# Altium PCB HLW8012-Demo_0815.PcbDoc
Units mm, origin at the board's own origin, x right, y up, seen from the top; angles counter-clockwise.
Board outline 64.25 x 81.25 mm, 2 copper layers (Top Layer, Bottom Layer); 76 components, 58 nets, 236 pads, 50 vias.
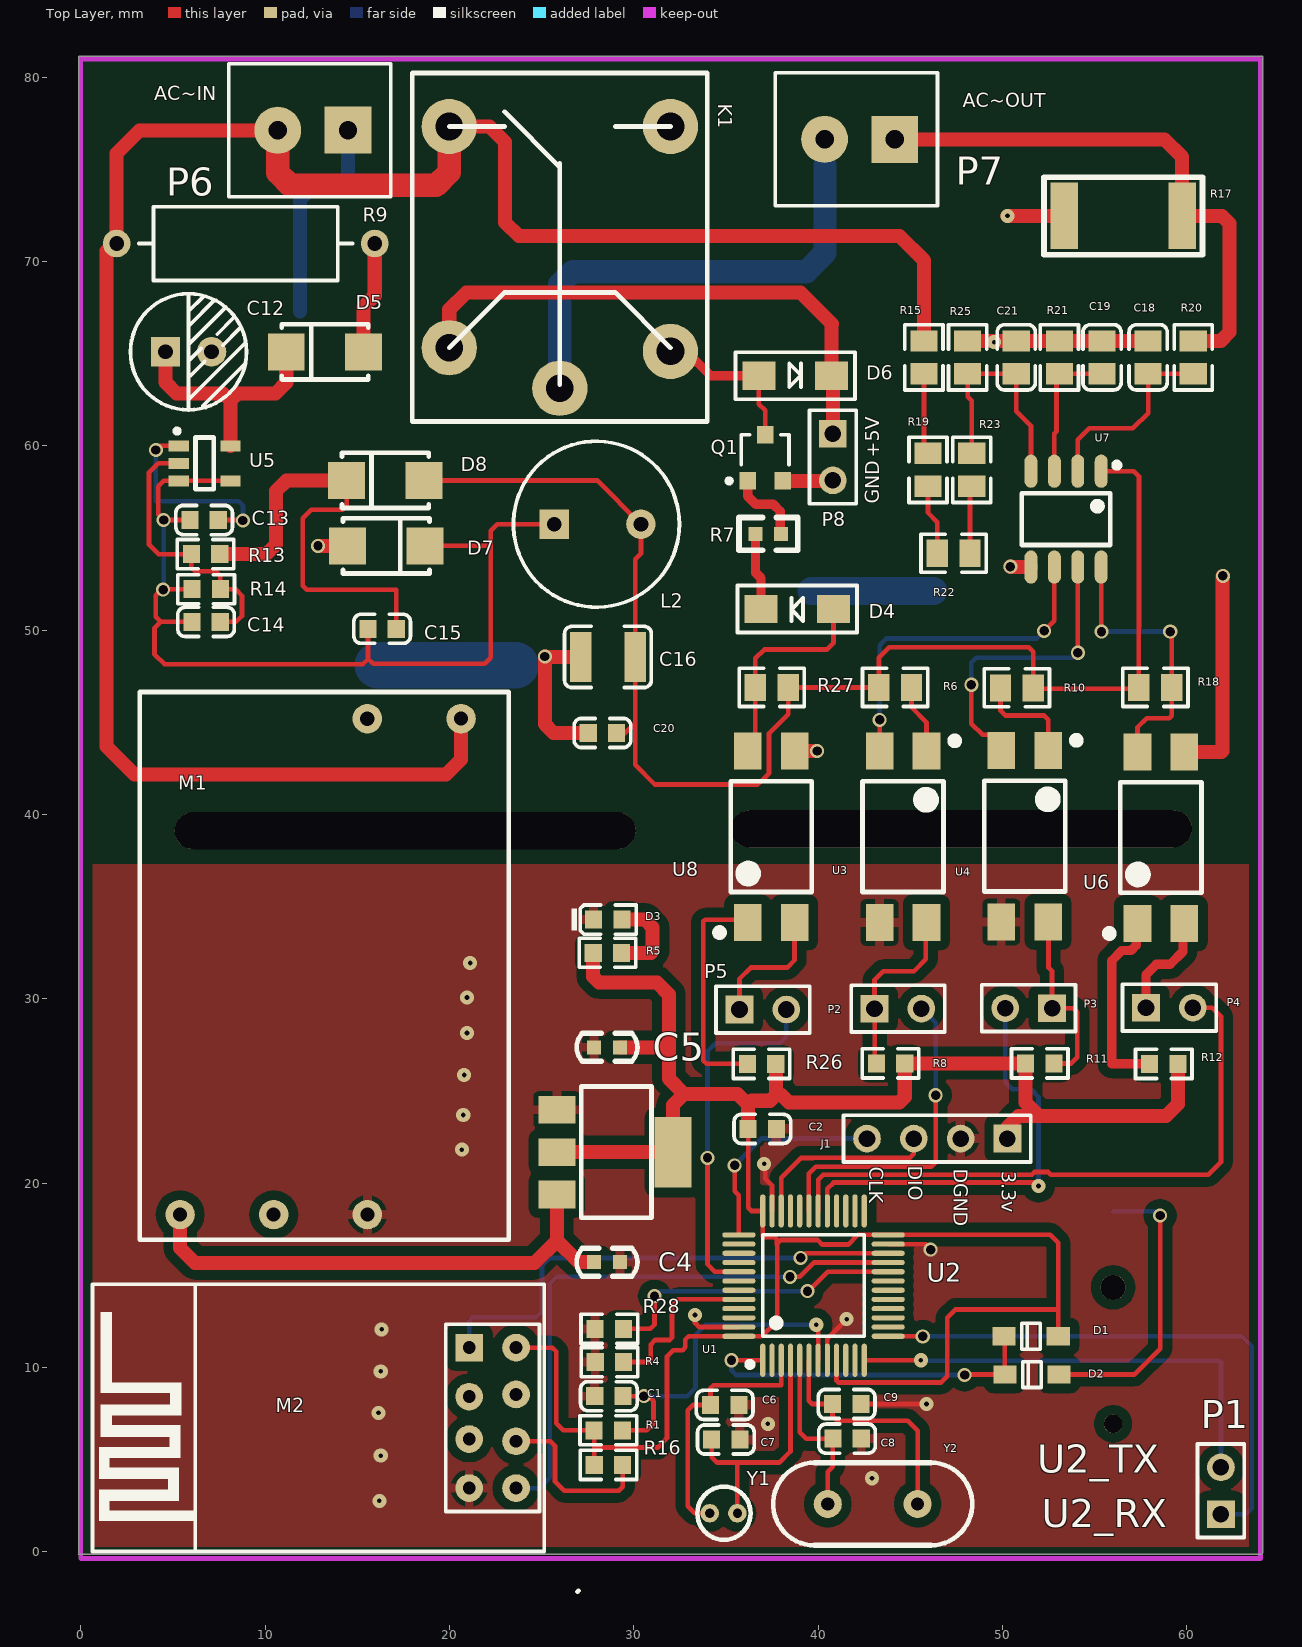
[diagram p0: Top Layer view]
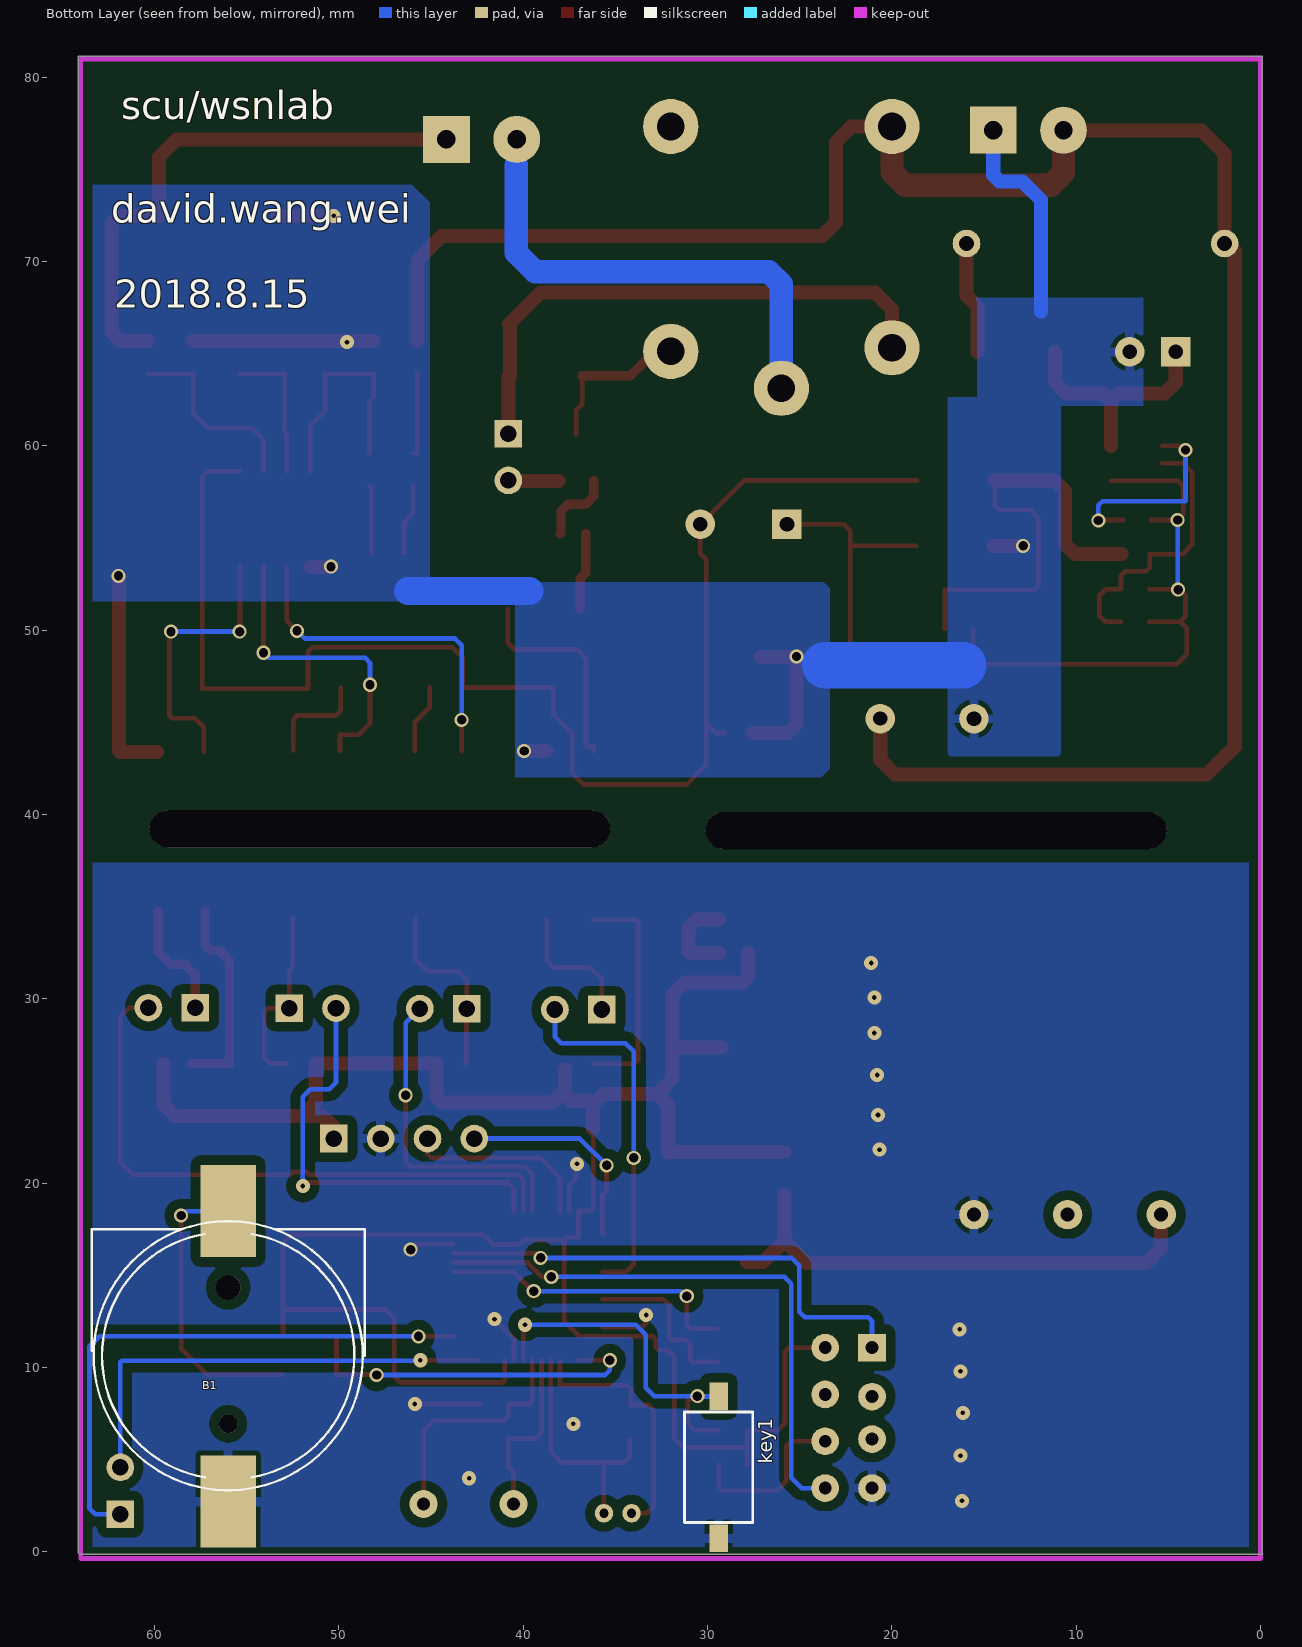
[diagram p1: Bottom Layer view, seen from below]
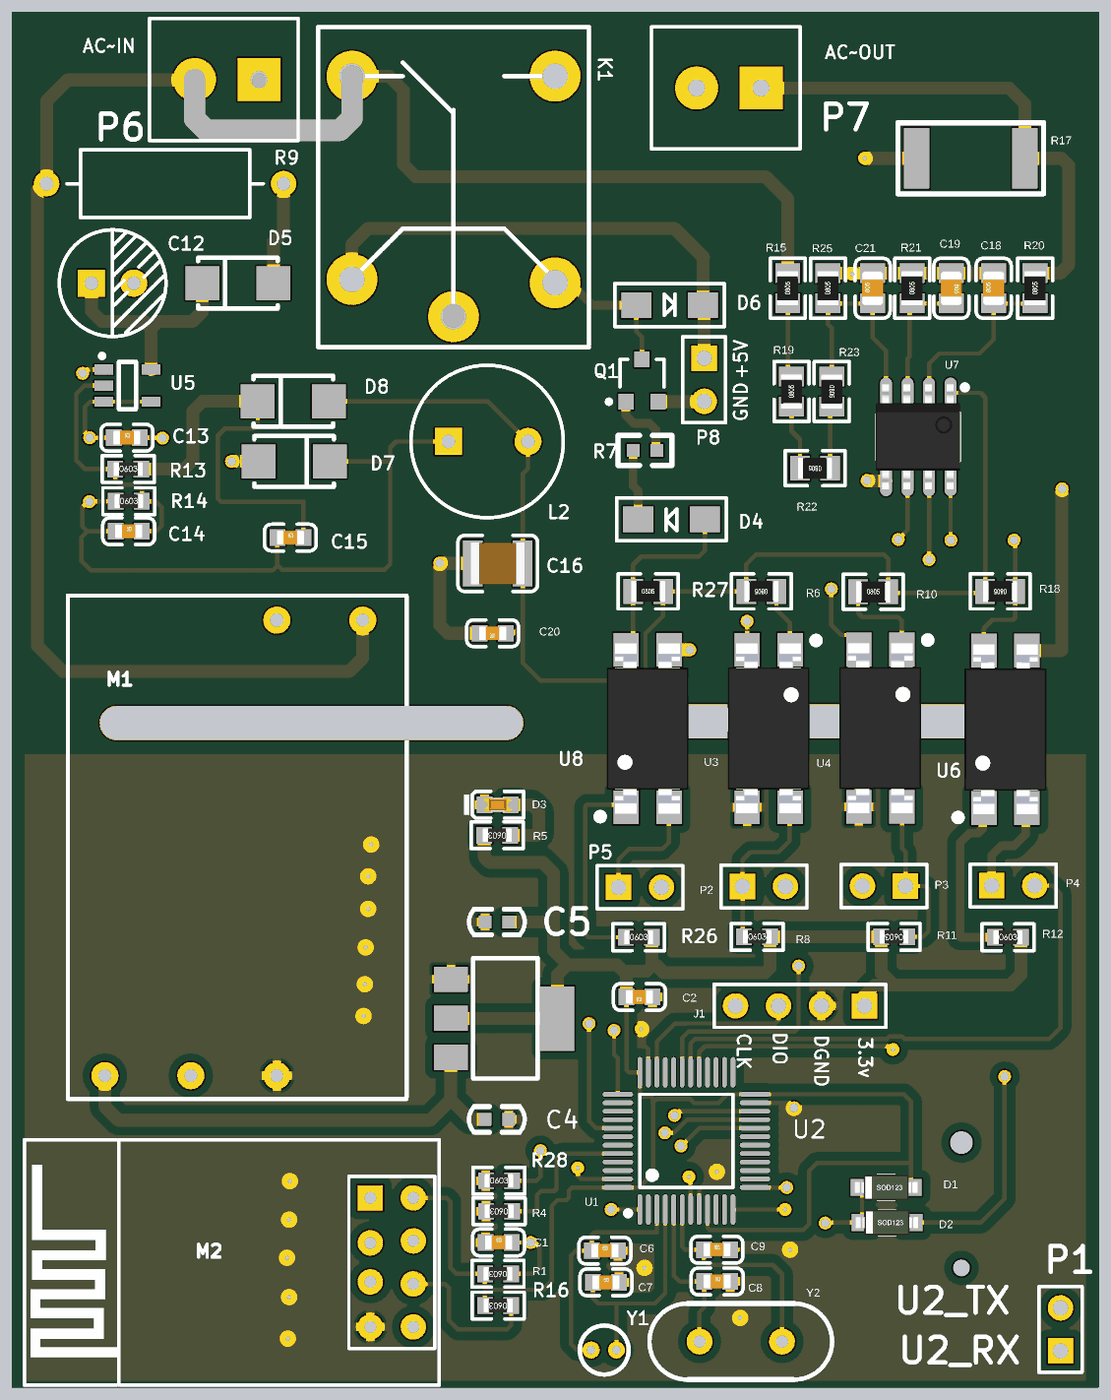
[diagram p2: 3D render of the assembled board from above, using the file's embedded part models]

## Layer stack, top to bottom
Top Solder: solder mask 0.0102, Solder Resist, Dk 3.5
Top Layer: signal copper 0.0356
Dielectric 1: dielectric 0.32, FR-4, Dk 4.8
Bottom Layer: signal copper 0.0356
Bottom Solder: solder mask 0.0102, Solder Resist, Dk 3.5

## Board outline
64.125,81.125 64.125,-0.05 64.05,-0.125 -0.125,-0.125 -0.1,-0.1 -0.1,81.125

## Design rules (kind name [scope] priority, off if disabled: settings)
Clearance Clearance_1 [InPolygon] p1: gap=0.508 ignorepadtopadclearanceinfootprint=FALSE except(0: Arc-Hole Track-Hole SMDPad-Hole THPad-Hole Via-Hole Fill-Hole Poly-Hole Region-Hole Text-Hole)
Clearance [All] p2: gap=0.178 ignorepadtopadclearanceinfootprint=FALSE except(0: Arc-Hole Track-Hole SMDPad-Hole THPad-Hole Via-Hole Fill-Hole Poly-Hole Region-Hole Text-Hole)
ComponentClearance [All] p1: gap=0.102 collisioncheckmode=3 verticalgap=0.102 showdistances=FALSE
DiffPairsRouting [All] p1: maxlimit=0.254 minlimit=0.254 mostfreqgap=0.254 toplayer_minwidth=0.254 toplayer_maxwidth=0.381 toplayer_prefwidth=0.381 bottomlayer_minwidth=0.254 bottomlayer_maxwidth=0.381 bottomlayer_prefwidth=0.381 maxuncoupledlength=12.7
HoleSize [All] p1: absolutevalues=TRUE maxlimit=12.7 minlimit=0.025 maxpercent=80.000 minpercent=20.000
HoleToHoleClearance [All] p1: gap=0.102 allowstackedmicrovias=TRUE
MinimumSolderMaskSliver [All] p1: minsoldermaskwidth=0.102
PolygonConnect PolygonConnect_1 [Isvia] p1: connectstyle=Direct reliefconductorwidth=0.254 reliefentries=4 polygonreliefangle="90 Angle" airgapwidth=0.254
PolygonConnect [All] p2: connectstyle=Relief reliefconductorwidth=0.508 reliefentries=4 polygonreliefangle="90 Angle" airgapwidth=0.254
RoutingVias [All] p1: holewidth=0.508 width=0.762 viastyle="Through Hole" minholewidth=0.254 minwidth=0.254 maxholewidth=0.711 maxwidth=1.27
SilkToSilkClearance [All] p1: silktosilkclearance=0.102
SilkToSolderMaskClearance [IsPad] p1: minsilkscreentomaskgap=0 clearancetoexposedcopper=TRUE
SolderMaskExpansion [All] p1: expansion=0.102
Width [All] p1: maxlimit=12.7 minlimit=0.254 preferedwidth=0.254 minimp=50.000000 maximp=50.000000 favimp=50.000000
23 further rules are at their usual default settings.

## Components (designator, comment, footprint, x,y, rotation, side; value= is the part's Value field where it differs from the comment)
B1 "BAT" "BATTERY SOCKET" 56,10.614 r270 bottom value=红色
C1 "0.1μF" LC-0603_C 28.65,8.45 r0 top
C2 "0.1μF" LC-0603_C 36.975,22.95 r180 top
C4 "104" 0603C 28.4,15.75 r180 top
C5 "104" 0603C 28.701,27.343 r0 top
C6 "6pF" LC-0603_C 34.93,7.975 r0 top
C7 "6pF" LC-0603_C 34.995,6.1 r0 top
C8 "20pF" LC-0603_C 41.57,6.15 r0 top
C9 "20pF" LC-0603_C 41.55,8.025 r0 top
C12 "3.3μF/400V" CAP-ELECT-TH-6.3X7 5.85,65.1 r0 top value=2.2μF/400V
C13 "2.2μF/10V" LC-0603_C 6.695,55.975 r0 top value="100nF (104) ±10% 50V"
C14 "470pF" LC-0603_C 6.8,50.45 r0 top value="100nF (104) ±10% 50V"
C15 "220nF" LC-0603_C 16.35,50.075 r0 top value="100nF (104) ±10% 50V"
C16 "100μF" LC-1210_C 28.6,48.55 r0 top value="100nF (104) ±10% 50V"
C18 "33nF" LC-0805_C 57.9,64.8 r90 top value="100nF (104) ±10% 50V"
C19 "33nF" LC-0805_C 55.4,64.8 r270 top value="100nF (104) ±10% 50V"
C20 "0.1μF" LC-0603_C 28.3,44.425 r180 top value="100nF (104) ±10% 50V"
C21 "33nF" LC-0805_C 50.75,64.8 r90 top value="100nF (104) ±10% 50V"
D1 "MBR0520L" LC-SOD-123 51.55,11.7 r0 top
D2 "MBR0520L" LC-SOD-123 51.6,9.625 r0 top
D3 "POWER" LC-0603_LED_S1 28.595,34.3 r0 top value=红色
D4 "IN4148" 1206D 42.107,51.912 r270 top
D5 "1N4007" LC-SMA(DO-214AC)_S1 13.25,65.1 r0 top
D6 "" 1206D 35.518,63.038 r90 top
D7 "US1J(600V 1A)" LC-SMA(DO-214AC)_S1 16.575,54.575 r180 top
D8 "1N4007" LC-SMA(DO-214AC)_S1 16.525,58.125 r0 top
J1 "4P/NC" HDR1X4 50.27,22.425 r180 top
K1 "Relay-5V" RLAYSPDT 24.975,71.25 r90 top
key1 "SW" KEY-2 29.4,0.75 r90 bottom
L2 "1mH" L-10X14 27.975,55.75 r0 top
M1 "ACDC_THX208based" ACDC_THX208 23.15,46.65 r270 top
M2 "ESP-01&01S Module" "ESP-01&01S Module" 22.345,7.275 r90 top
P1 "Header" HDR1X2 61.85,2.05 r90 top
P2 "Header" HDR1X2 43.06,29.475 r0 top
P3 "Header" HDR1X2 52.69,29.5 r180 top
P4 "Header" HDR1X2 57.785,29.525 r0 top
P5 "Header" HDR1X2 35.735,29.425 r0 top
P6 "Header" 3.81-2P 14.5,77.15 r180 top
P7 "Header" 3.81-2P 44.16,76.65 r180 top
P8 "Header" HDR1X2 40.8,60.665 r270 top
Q1 "S8050" SOT-23 37.125,59.35 r0 top
R1 "10KΩ" LC-0603_R 28.62,6.6 r180 top
R4 "10KΩ" LC-0603_R 28.68,10.3 r180 top
R5 "1.5KΩ" LC-0603_R 28.57,32.5 r180 top
R6 "1KΩ,1%" LC-0805_R 44.175,46.9 r180 top
R7 "Res2" 0603 37.997,55.225 r180 top value=4.7K
R8 "2.2KΩ" LC-0603_R 43.93,26.5 r0 top
R9 "39Ω/1W" R-1W-THT 8.95,70.975 r0 top
R10 "1KΩ,1%" LC-0805_R 50.785,46.875 r0 top
R11 "2.2KΩ" LC-0603_R 52.02,26.5 r180 top
R12 "2.2KΩ" LC-0603_R 58.75,26.475 r0 top
R13 "5.49KΩ" LC-0603_R 6.775,54.125 r0 top
R14 "4.99KΩ" LC-0603_R 6.805,52.225 r0 top
R15 "470KΩ,1%" LC-0805_R 45.735,64.8 r90 top
R16 "4.7KΩ" LC-0603_R 28.625,4.725 r180 top
R17 "2mΩ/25A" R2512 56.55,72.475 r180 top
R18 "1KΩ,1%" LC-0805_R 58.29,46.9 r180 top
R19 "470KΩ,1%" LC-0805_R 45.96,58.7 r90 top
R20 "1KΩ,1%" LC-0805_R 60.35,64.8 r90 top
R21 "1KΩ,1%" LC-0805_R 53.086,64.8 r90 top
R22 "470KΩ,1%" LC-0805_R 47.35,54.175 r180 top
R23 "470KΩ,1%" LC-0805_R 48.335,58.7 r270 top
R25 "1KΩ,1%" LC-0805_R 48.11,64.8 r90 top
R26 "2.2KΩ" LC-0603_R 36.93,26.475 r0 top
R27 "1KΩ,1%" LC-0805_R 37.485,46.9 r0 top
R28 "10KΩ" LC-0603_R 28.675,12.1 r0 top
U1 "STM32F103C8T6" LC-LQFP-48_7x7x05P 39.75,14.45 r0 top
U2 "LM1117-3.3V" SOT-223/P2.3 28.65,21.725 r0 top
U3 "PC817" LC-SMD-4 44.605,38.8 r270 top
U4 "PC817" LC-SMD-4 51.205,38.825 r270 top
U5 "MP150" LC-SOT-23-5 6.725,59.05 r180 top
U6 "PC817" LC-SMD-4 58.595,38.75 r90 top
U7 "HLW8012" LC-SOP-8_150mil 53.45,56.025 r180 top
U8 "PC817" LC-SMD-4 37.455,38.8 r90 top
Y1 "32.768K" CRYSTAL 34.35,2.1 r180 top
Y2 "8M" 49/U_N 40.523,2.6 r0 top value="25MHz ±20ppm 20pF"

## Footprints (in the part's own frame and the unit in brackets; to place one, negate y for a bottom-side part, rotate by r counter-clockwise, add the part's x,y. Pads: shape width x height; smd on the part's side, far side on the other; paste and mask are expansions set on the pad)
3.81-2P [mm]
  rect 2.54x2.54 hole 1: 1(0,0.025)
  round 2.54 hole 1: 2(3.81,0.025)
  silkscreen extent -2.31,-3.58 6.48,3.63
49/U_N [mil]
  round 60 hole 28: 1(0,0) 2(192,0)
  silkscreen extent -116,-88 308,89, body extent -117,-88 309,89, height 512
0603 [mil]
  rect 30x30 smd: 1(0,0) 2(55,0)
  silkscreen extent -35,-35 90,35
0603C [mil]
  rect 30x30 smd: 1(21.61,1.26) 2(-33.39,1.26)
  silkscreen extent -71,-29 59,31
1206D [mil]
  rect 60x70 smd: 1(30,-50) 2(30,-205)
  silkscreen extent -20,-255 80,0
ACDC_THX208 [mm]
  round 1.6 hole 0.762: 1(1.45,-2.52) 3(28.35,-7.6) 4(28.35,-12.68) 5(28.35,-17.76)
  round 1.6 hole 0.8: 2(1.45,-7.6)
  silkscreen extent 0,-19.94 29.72,0.06
"BATTERY SOCKET" [mm]
  rect 5x3 smd: 1(-7.874,0) 2(7.874,0)
  round 1 hole 1 unplated: 3(3.664,0)
  round 1.35 hole 1.35 unplated: 4(-3.736,0)
  silkscreen extent -7.33,-7.41 7.26,7.41
CAP-ELECT-TH-6.3X7 [mm]
  rect 1.6x1.6 hole 0.8: 1(-1.25,0)
  round 1.6 hole 0.8: 2(1.25,0)
  silkscreen extent -3.15,-3.15 3.15,3.15
CRYSTAL [mm]
  round 1 hole 0.5: 1(-1.27,0) 2(0.23,0)
  silkscreen extent -1.99,-1.44 0.9,1.44
"ESP-01&01S Module" [mm]
  rect 1.5x1.5 hole 0.7: 1(3.81,1.27)
  round 1.5 hole 0.7: 2(1.15,1.27) 3(-1.15,1.27) 4(-3.81,1.27) 5(3.81,-1.27) 6(1.27,-1.27) 7(-1.27,-1.27) 8(-3.81,-1.27)
  silkscreen extent -7.25,-2.79 7.25,21.71
HDR1X2 [mm] "Connector; Header; 2 Position"
  rect 1.5x1.5 hole 0.9: 1(0,0)
  round 1.5 hole 0.9: 2(2.54,0)
  silkscreen extent -1.27,-1.27 3.81,1.27
HDR1X4 [mm] "Connector; Header; 4 Position"
  rect 1.5x1.5 hole 0.9: 1(0,0)
  round 1.5 hole 0.9: 2(2.54,0) 3(5.08,0) 4(7.62,0)
  silkscreen extent -1.27,-1.27 8.89,1.27
KEY-2 [mm]
  rect 1.5x1 smd: 1(-0.005,-0.001) 2(7.685,-0.001)
  silkscreen extent 0.85,-1.85 6.85,1.86
L-10X14 [mm]
  rect 1.6x1.6 hole 0.8: 1(-2.286,0)
  round 1.6 hole 0.8: 2(2.413,0)
  silkscreen extent -4.5,-4.5 4.5,4.5
LC-0603_C [mm]
  rect 0.93x0.98 smd: 1(-0.77,0) 2(0.77,0)
  silkscreen extent -1.53,-0.79 1.54,0.79, body extent -0.8,-0.4 0.8,0.4, height 0.3
LC-0603_LED_S1 [mm]
  rect 0.93x0.98 smd: A(0.77,0) K(-0.77,0)
  silkscreen extent -1.98,-0.79 1.53,0.79, body extent -0.8,-0.4 0.8,0.4, height 0.6
LC-0603_R [mm]
  rect 0.93x0.98 smd: 1(-0.77,0) 2(0.77,0)
  silkscreen extent -1.54,-0.79 1.53,0.79, body extent -0.85,-0.4 0.85,0.4, height 0.56
LC-0805_C [mm]
  rect 1.16x1.47 smd: 1(-0.89,0) 2(0.89,0)
  silkscreen extent -1.77,-1.04 1.77,1.04, body extent -1,-0.62 1,0.63, height 0.77
LC-0805_R [mm]
  rect 1.16x1.47 smd: 1(-0.89,0) 2(0.89,0)
  silkscreen extent -1.77,-1.03 1.77,1.04, body extent -1,-0.62 1,0.63, height 0.49
LC-1210_C [mm]
  rect 1.16x2.72 smd: 1(-1.475,0) 2(1.475,0)
  silkscreen extent -2.36,-1.66 2.35,1.66, body extent -1.6,-1.25 1.6,1.25, height 1.3
LC-LQFP-48_7x7x05P [mm]
  oval 0.28x1.8 smd mask+0.051: 1(-2.75,-4.05) 2(-2.25,-4.05) 3(-1.75,-4.05) 4(-1.25,-4.05) 5(-0.75,-4.05) 6(-0.25,-4.05) 7(0.25,-4.05) 8(0.75,-4.05) 9(1.25,-4.05) 10(1.75,-4.05) 11(2.25,-4.05) 12(2.75,-4.05) 25(2.75,4.05) 26(2.25,4.05) 27(1.75,4.05) 28(1.25,4.05) 29(0.75,4.05) 30(0.25,4.05) 31(-0.25,4.05) 32(-0.75,4.05) 33(-1.25,4.05) 34(-1.75,4.05) 35(-2.25,4.05) 36(-2.75,4.05)
  oval 1.8x0.28 smd mask+0.051: 13(4.05,-2.75) 14(4.05,-2.25) 15(4.05,-1.75) 16(4.05,-1.25) 17(4.05,-0.75) 18(4.05,-0.25) 19(4.05,0.25) 20(4.05,0.75) 21(4.05,1.25) 22(4.05,1.75) 23(4.05,2.25) 24(4.05,2.75) 37(-4.05,2.75) 38(-4.05,2.25) 39(-4.05,1.75) 40(-4.05,1.25) 41(-4.05,0.75) 42(-4.05,0.25) 43(-4.05,-0.25) 44(-4.05,-0.75) 45(-4.05,-1.25) 46(-4.05,-1.75) 47(-4.05,-2.25) 48(-4.05,-2.75)
  silkscreen extent -3.6,-4.42 2.75,2.75
LC-SMA(DO-214AC)_S1 [mm]
  rect 2x2 smd: 1(2.1,0) 2(-2.1,0)
  silkscreen extent -2.35,-1.5 2.35,1.5
LC-SMD-4 [mm]
  rect 2x1.5 smd: 1(-4.65,1.27) 2(-4.65,-1.27) 3(4.65,-1.27) 4(4.65,1.27)
  silkscreen extent -5.4,-2.2 3,3, body extent -5.02,-2.42 5.01,2.42, height 3.9
LC-SOD-123 [mm]
  rect 1.25x1 smd: 1(1.475,0) 2(-1.475,0)
  silkscreen extent -0.5,-0.7 0.5,0.7, body extent -1.85,-0.77 1.85,0.78, height 1.35
LC-SOP-8_150mil [mm]
  oval 0.7x1.8 smd: 1(-1.905,-2.6) 2(-0.635,-2.6) 3(0.635,-2.6) 4(1.905,-2.6) 5(1.905,2.6) 6(0.635,2.6) 7(-0.635,2.6) 8(-1.905,2.6)
  silkscreen extent -2.9,-3.07 2.4,1.4, body extent -2.5,-3.1 2.5,3.1, height 1.75
LC-SOT-23-5 [mm]
  rect 1.1x0.6 smd: 1(1.4,-0.95) 2(1.4,0) 3(1.4,0.95) 4(-1.4,0.95) 5(-1.4,-0.95)
  silkscreen extent -0.5,-1.87 1.62,1.4
R2512 [mm]
  rect 1.5x3.6 smd: 1(-3.2,0) 2(3.2,0)
  silkscreen extent -4.3,-2.1 4.3,2.1
R-1W-THT [mm]
  round 1.5 / inner oval 1.5x2 / far side round 1.5 hole 0.8: 1(-7,0)
  round 1.5 hole 0.8: 2(7,0)
  silkscreen extent -5.8,-2 5.8,2
RLAYSPDT [mm]
  round 3 hole 1.5: 1(-8.128,-1.016) 2(6.072,4.984) 3(6.072,-7.016) 4(-6.128,-7.016) 5(-5.928,4.984)
  silkscreen extent -9.93,-9.02 8.97,6.98
SOT-23 [mm]
  rect 0.9x0.95 smd: 1(-0.95,-1.25) 2(0.95,-1.25) 3(0,1.25)
  silkscreen extent -2.07,-1.37 1.3,1.25
SOT-223/P2.3 [mil]
  rect 79x59 smd: 1(-111,89.1) 2(-111,-1.45) 3(-111,-92)
  rect 79x150 smd: 2(137,-1.9)
  silkscreen extent -59,-141 91,139

## Part data
B1: "电池"
C1 C2 C6 C7 C8 C9: library part Cap, "贴片电容", 名称=电容, 型号=1μF, 封装=0805
C4 C5: library part CAP, "Capacitor"
C12: library part "Cap Pol1", "直插电解电容", LatestRevisionDate=17-Jul-2002, LatestRevisionNote="Re-released for DXP Platform.", PackageReference=RB7.6-15, Published=8-Jun-2000, Publisher="Altium Limited"
C13 C14 C15 C16 C18 C19 C20 C21: library part CAP, "贴片电容"
D1 D2: library part "Diode 18TQ045", "贴片肖特基二极管", ComponentLink1Description="Manufacturer Link", ComponentLink1URL=http://www.irf.com/, ComponentLink2Description=Datasheet, ComponentLink2URL=http://www.irf.com/product-info/datasheets/data/18tq.pdf, DatasheetVersion=Dec-1997, LatestRevisionDate=17-Jul-2002, LatestRevisionNote="Re-released for DXP Platform.", Note="Terminal 2 is the TAB and is electrically connected to the cathode", PackageDescription="TO, Thru-Hole, Vertical, Heatsink Mounted; 3 In-Line Leads (1 Absent); Pitch 2.54 mm", PackageReference=TO-220AC, PackageVersion=Feb-1998, Published=8-Jun-2000, Publisher="Altium Limited"
D3: library part LED1, "发光二极管"
D4 D6: library part Diode, "Default Diode", PackageDocument=Sep-1996, Code_JEDEC=DO-214-AB, LatestRevisionDate=17-Jul-2002, LatestRevisionNote="Re-released for DXP Platform.", PackageReference=SMC, Published=8-Jun-2000, Publisher="Altium Limited"
D5 D7 D8: library part "Diode 1N5408", "贴片二极管", ComponentLink1Description="Manufacturer Link", ComponentLink1URL=http://www.irf.com/, DatasheetDocument=Aug-1984, LatestRevisionDate=17-Jul-2002, LatestRevisionNote="Re-released for DXP Platform.", PackageReference=DO-201AD, Published=8-Jun-2000, Publisher="Altium Limited"
J1: library part "Header 4", "接口", LatestRevisionDate=17-Jul-2002, LatestRevisionNote="Re-released for DXP Platform.", Publisher="Altium Limited"
K1: library part Relay-SPDT, "Single-Pole Dual-Throw Relay", LatestRevisionDate=17-Jul-2002, LatestRevisionNote="Re-released for DXP Platform.", PackageReference=MODULE5B, Published=24-Mar-1999, Publisher="Altium Limited"
key1: "Switch", LatestRevisionDate=17-Jul-2002, LatestRevisionNote="Re-released for DXP Platform.", PackageReference=SPST-2, Published=24-Mar-1999, Publisher="Altium Limited"
L2: library part IND_8, "直插绕线电感", AtherosDescription="IND,SMT,SHIELDING CHOKE,10uH,7.3x7.3", ATHEROS KEY=078-100LM-000, CISPartType=Inductor\Ferrite, OriginalSymbolOrigin=(0,0)
M1: library part ACDC, "THX208Based"
P1 P2 P3 P4 P5 P6 P7 P8: library part "Header 2", "Header, 2-Pin", LatestRevisionDate=17-Jul-2002, LatestRevisionNote="Re-released for DXP Platform.", Publisher="Altium Limited"
Q1: library part NPN, "NPN Bipolar Transistor", Code_JEDEC=TO-226-AA, LatestRevisionDate=17-Jul-2002, LatestRevisionNote="Re-released for DXP Platform.", PackageReference=TO-226, Published=8-Jun-2000, Publisher="Altium Limited"
R1 R4 R5 R6 R8 R9 R10 R11 R12 R13 R14 R15 R17 R18 R19 R20 R21 R22 R23 R25 R26 R27 R28: library part 电阻, "贴片电阻", 名称=电阻, 型号=1KΩ
R7: "Resistor", LatestRevisionDate=17-Jul-2002, LatestRevisionNote="Re-released for DXP Platform.", PackageReference=AXIAL-0.4, Published=8-Jun-2000, Publisher="Altium Limited"
R16: library part "0805 62KΩ (6202) 1%", "贴片电阻", Package=0402, SuppliersPartNumber=C17783, ComponentLink1Description=供应商链接, ComponentLink1URL=http://www.szlcsc.com/product/details_18471.html, Supplier=LC
U1: library part STM32F103CBT6, "IC", ComponentLink1Description="Manufacturer Link", ComponentLink1URL=www.st.com/stm32, ComponentLink2Description=Datasheet, ComponentLink2URL=http://www.st.com/stonline/products/literature/ds/13587.pdf, DatasheetVersion="rev6, Mar-2008", PackageDescription="48-Pin Low-Profile Quad Flat Pack, 7 x 7 mm Body, 0.5 mm Pitch (LQFP48)", PackageReference=LQFP48, PackageVersion=Mar-2008, Published=30-May-2008, Publisher="Altium Limited", 厂商=ST, 名称=IC, 型号=STM32F103CBT6, 封装=LQFP48
U2: library part 1117
U3 U4 U6 U8: library part PS2501L-1-F3-A, "IC"
U5 U7: "IC"
Y1: library part XTAL, "Crystal Oscillator", LatestRevisionDate=17-Jul-2002, LatestRevisionNote="Re-released for DXP Platform.", PackageReference=R38, Published=8-Jun-2000, Publisher="Altium Limited"
Y2: library part XTAL_1, "晶振（直插）", LatestRevisionDate=17-Jul-2002, LatestRevisionNote="Re-released for DXP Platform.", PackageReference=R38, Published=8-Jun-2000, Publisher="Altium Limited"

## Free pads (board coordinates)
  oval 25x2 hole 2 slot 25 at 0 deg paste+0: 0(17.6,39.125) 0(47.775,39.225)

## Via types
v1: diameter 0.762, hole 0.508, Top Layer to Bottom Layer, 28 vias
v2: diameter 0.762, hole 0.254, Top Layer to Bottom Layer, 22 vias

## Nets (pads, with @x,y where several pads share a name; then routed paths per layer and width w, separated by ;. In a path a pad name is that pad's centre, name@x,y a point inside that pad or via, vN(x,y) a via of type N, cw(c..) or ccw(c..) an arc to the next point about the centre after c; other vN are vias at no path point)
+3.3V: C2.2 C5.1 D1.1 J1.1 M2.5 R1.2 R5.2 R8.2 R11.2 R12.2 R16.2 R26.2 U1.9 U1.24 U1.36 U1.48 U2.2 | length 138.8
  Top Layer w0.254: M2.5 25.59,11.085 25.8,10.875 25.8,6.975 26.175,6.6 R1.2 27.85,5.665 ; R16.2 27.85,4.73 27.85,5.665 ; C2.2 36.205,18.67 36.375,18.5 U1.36 37,17.1 37.025,17.075 37.65,17.075 37.75,16.975 37.75,16.675 37.775,16.675 ; U1.9 41,9.3 41.105,9.195 46.67,9.195 47,9.525 47,12.7 47.45,13.15 53.025,13.15 ; D1.1 53.025,13.15 ; 27.85,5.665 31.29,5.665 31.8,6.175 31.8,10.6 32.15,10.95 32.65,10.95 32.8,11.1 32.8,11.525 32.975,11.7 U1.48 36.95,11.7 37.775,12.525 37.775,16.675 ; 37.775,16.675 37.775,16.725 37.972,16.922 39.972,16.922 40.219,16.675 41.625,16.675 42.15,17.2 U1.24 52.6,17.2 53.025,16.775 53.025,13.15
  Top Layer w0.762: U2.2@25.831,21.688 32.118,21.688 32.13,21.677 32.13,24.255 32.725,24.85 ; R5.2 27.8,31.225 28.125,30.9 31.25,30.9 31.9,30.25 31.9,27.45 ; C5.1 31.825,27.375 31.9,27.45 ; C2.2 36.205,24.28 ; R26.2@37.72,26.2 37.72,24.795 ; J1.1 50.27,23.045 50.875,23.65 51.975,23.65 ; R12.2 59.52,24.295 58.875,23.65 51.975,23.65 ; 31.9,27.45 31.9,25.675 32.725,24.85 ; 32.725,24.85 35.635,24.85 36.205,24.28 ; 36.205,24.28 36.4,24.475 37.4,24.475 37.72,24.795 ; 37.72,24.795 38.005,24.795 38.425,24.375 44.4,24.375 44.7,24.675 R8.2 R11.2 51.25,24.375 51.975,23.65
+5V: C4.1 M1.5 U2.3 | length 28.1
  Top Layer w0.762: M1.5 5.39,16.485 6.2,15.675 24.625,15.675 25.831,16.881 ; U2.3 25.831,16.881 ; C4.1 26.993,15.718 25.831,16.881
A+5V: C16.2 C20.1 D8.1 L2.2 R6.2 R10.2 R18.2 R27.2 U7.1 | length 76.9
  Top Layer w0.254: D8.1 28.013,58.125 L2.2 30.388,54.153 30.075,53.84 C16.2 30.075,44.958 ; C20.1 29.542,44.425 30.075,44.958 ; R27.2 R27.2@38.375,46.888 ; U7.1 57.125,58.625 57.404,58.346 57.404,50.14 57.4,50.136 R18.2 57.4,46.818 51.675,46.818 R10.2 51.675,48.825 51.425,49.075 43.85,49.075 43.285,48.51 R6.2 43.285,46.888 R27.2@38.375,46.888 ; 30.075,44.958 30.075,42.696 31.14,41.631 36.728,41.631 37.338,42.24 37.338,44.404 38.375,45.441 R27.2@38.375,46.888
AC220V-L: K1.2 M1.1 P6.2 R9.1 R15.2 | length 114.5
  Top Layer w0.762: P6.2 10.665,77.1 3.2,77.1 1.95,75.85 R9.1 1.8,70.975 1.4,70.575 1.4,43.7 2.925,42.175 19.825,42.175 20.63,42.98 M1.1 ; K1.2 22.178,77.322 23.025,76.475 23.025,72.125 23.775,71.375 44.425,71.375 45.735,70.065 R15.2
  Top Layer w1.27: P6.2 10.69,74.81 11.375,74.125 19.275,74.125 19.991,74.841 K1.2
AC220V-N: C12.2 C16.1 C18.2 C19.1 C20.2 C21.2 D7.1 M1.2 P6.1 R17.2 R21.2 R25.2 U6.3 U7.5 U8.3 | length 62.3
  Top Layer w0.762: v1(12.875,54.575) D7.1 ; C16.1 25.2,48.55 v1(25.175,48.575) 25.175,44.9 25.65,44.425 C20.2 ; U8.3 v1(39.95,43.45) ; R25.2 C21.2 R21.2 C19.1 C18.2 ; v2(50.275,72.475) R17.2 ; v1(50.425,53.45) 50.45,53.425 U7.5 ; U6.3 61.875,43.4 61.925,43.45 61.925,52.925 v1(61.95,52.95)
  Bottom Layer w0.762: 11.9,67.3 11.9,73.325 12.925,74.35 14.15,74.35 14.5,74.7 P6.1 ; 23.6,48.1 23.625,48.125
  Bottom Layer w1.524: 39.65,52.125 46.25,52.125
  Bottom Layer w2.54: 16.125,48.1 23.6,48.1
  other v2: 49.55,65.625
BOOT0: R4.1 U1.44 | length 9.2
  Top Layer w0.254: R4.1 30.8,10.3 30.925,10.425 30.925,11.25 31.175,11.5 31.95,11.5 32.075,11.625 32.075,13.375 32.4,13.7 U1.44
CF: U3.2 U7.6 | length 18.7
  Top Layer w0.254: U3.2 v1(43.335,45.136) ; v1(52.265,49.962) 52.815,50.512 U7.6
  Bottom Layer w0.254: v1(43.335,45.136) 43.335,49.185 43.7,49.55 51.853,49.55 v1(52.265,49.962)
CF1: U4.2 U7.7 | length 16.7
  Top Layer w0.254: v1(48.311,47.041) 48.311,44.933 48.92,44.323 49.935,44.323 U4.2 ; v1(54.085,48.776) U7.7
  Bottom Layer w0.254: v1(48.311,47.041) 48.311,48.236 48.575,48.5 53.809,48.5 v1(54.085,48.776)
CTL_Pin: P5.2 U1.41 | length 19.5
  Top Layer w0.254: v1(34,21.375) 34,15.6 34.4,15.2 U1.41
  Bottom Layer w0.254: v1(34,21.375) 34,27.15 34.45,27.6 37.925,27.6 38.275,27.95 P5.2
CTL_Pin_AC: D4.1 R27.1 U8.4 | length 11.9
  Top Layer w0.254: U8.4 36.185,43.688 36.595,43.688 R27.1 36.595,48.47 37.075,48.95 40.462,48.95 40.837,49.325 D4.1
DGND: B1.2 C1.1 C2.1 C4.2 C5.2 C6.2 C7.2 C8.2 C9.2 D3.K J1.2 key1.1 M1.3 M2.4 R4.2 R28.1 U1.8 U1.23 U1.35 U1.47 U2.1 U3.3 U4.3 | length 14.3
  Top Layer w0.254: v2(33.325,12.85) 33.325,12.425 33.55,12.2 U1.47 ; v2(37.075,21.05) 37.125,21 37.125,20.25 37.5,19.875 U1.35 ; U1.8 40.5,11.6 40.525,11.6 v2(41.55,12.625) ; C9.2 v2(45.875,8.025) ; U1.23 45.85,16.7 46.1,16.45 v1(46.1,16.4)
  other v2: 16.2,2.775 42.925,4 16.275,5.225 37.275,6.95 16.15,7.55 16.275,9.8 16.325,12.075 20.675,21.825 20.75,23.7 20.8,25.875 20.95,28.15 20.95,30.075 21.125,31.95
NetB1_1: B1.1 D2.1 | length 15.9
  Top Layer w0.254: D2.1 57.15,9.625 58.55,11.025 v1(58.55,18.25)
  Bottom Layer w0.254: B1.1 58.312,18.488 v1(58.55,18.25)
NetC12_1: C12.1 D5.2 U5.5 | length 13.1
  Top Layer w0.762: C12.1 4.6,63.45 5.2,62.85 7.725,62.85 8.125,62.45 ; U5.5 8.125,62.45 ; D5.2 11.15,63.425 10.575,62.85 8.525,62.85 8.125,62.45
NetC13_1: C13.1 C14.1 C15.1 D7.2 L2.1 R14.1 U5.3 U5.4 | length 53
  Top Layer w0.254: v1@4.4,52.225 4.075,51.9 4.075,50.725 4.35,50.45 ; v1@4.475,52.225 R14.1 ; C13.1 v1(4.5,55.975) 4.2,56.275 4.2,57.8 4.5,58.1 U5.3 U5.4 ; C14.1 4.35,50.45 ; C15.1 15.585,50.07 15.585,48.465 ; D7.2 22.175,54.575 22.25,54.65 ; L2.1 22.6,55.75 22.25,55.4 22.25,54.65 ; 4.35,50.45 4,50.1 4,48.7 4.55,48.15 15.3,48.15 15.585,48.435 15.585,48.465 ; 15.585,48.465 15.875,48.175 21.925,48.175 22.25,48.5 22.25,54.65
  Bottom Layer w0.254: v1(4.475,52.2) 4.5,52.225 v1(4.5,55.975)
NetC13_2: C13.2 U5.1 | length 11.1
  Top Layer w0.254: v1(4.075,59.775) 4.3,60 U5.1 ; C13.2 8.775,55.975 v1(8.8,55.95)
  Bottom Layer w0.254: v1(4.075,59.775) 4.075,57 8.575,57 8.8,56.775 v1(8.8,55.95)
NetC14_2: C14.2 R13.1 R14.2 U5.2 | length 15.2
  Top Layer w0.254: U5.2 4.2,59.05 3.7,58.55 3.7,54.65 4.225,54.125 R13.1 6.005,53.42 6.225,53.2 7.325,53.2 7.575,52.95 R14.2 8.4,52.225 8.75,51.875 8.75,50.775 8.425,50.45 C14.2
NetC15_2: C15.2 D8.2 R13.2 | length 25.2
  Top Layer w0.254: D8.2 14.425,56.75 14.2,56.525 12.5,56.525 12.05,56.075 12.05,52.4 12.255,52.195 17.12,52.195 C15.2
  Top Layer w0.762: R13.2 10.075,54.125 10.6,54.65 10.6,57.55 11.175,58.125 D8.2
NetC18_1: C18.1 R20.1 U7.2 | length 10.7
  Top Layer w0.254: U7.2 54.085,60.335 54.7,60.95 57.075,60.95 57.9,61.775 C18.1 R20.1
NetC19_2: C19.2 R21.1 U7.3 | length 7.8
  Top Layer w0.254: U7.3 52.815,60.665 52.934,60.784 52.934,63.91 R21.1 C19.2
NetC21_1: C21.1 R23.1 R25.1 U7.4 | length 12.7
  Top Layer w0.254: R23.1 48.335,62.44 48.11,62.665 R25.1 C21.1 50.75,61.875 51.545,61.08 U7.4
NetD3_A: D3.A R5.1 | length 4.8
  Top Layer w0.762: R5.1 30.925,32.5 31.025,32.6 31.025,33.875 30.6,34.3 D3.A
NetD4_2: D4.2 R7.2 | length 4.2
  Top Layer w0.508: R7.2 36.6,53.125 36.9,52.825 D4.2
NetD5_1: D5.1 R9.2 | length 6.1
  Top Layer w0.762: D5.1 15.35,67.55 15.95,68.15 R9.2
NetD6_1: D6.1 K1.4 Q1.3 | length 8.7
  Top Layer w0.254: D6.1 36.788,62.262 37.125,61.925 Q1.3
  Top Layer w0.508: K1.4 32.853,65.122 34.175,63.8 D6.1
NetD6_2: D6.2 K1.5 P8.1 | length 29.9
  Top Layer w0.762: K1.5 19.991,67.391 20.925,68.325 39.05,68.325 40.762,66.613 40.725,66.576 D6.2 40.8,63.725 P8.1
NetK1_1: K1.1 P7.2 | length 25.5
  Bottom Layer w1.27: K1.1 25.991,68.766 26.675,69.45 39.35,69.45 40.375,70.475 40.375,75.225
NetM2_7: M2.7 R16.1 | length 9.3
  Top Layer w0.254: M2.7 25.47,6.005 25.725,5.75 25.725,3.825 26.225,3.325 29.175,3.325 29.395,3.545 R16.1
NetP2_1: P2.1 R8.1 U3.4 | length 10
  Top Layer w0.254: R8.1 43.075,26.585 43.075,29.46 P2.1 43.06,31.035 43.525,31.5 45.2,31.5 45.845,32.145 U3.4@45.845,34.35
NetP3_1: P3.1 R11.1 U4.4 | length 10.3
  Top Layer w0.254: U4.4@52.495,34.4 52.495,31.705 52.69,31.51 P3.1 53.85,29.5 54.05,29.3 54.05,26.825 53.725,26.5 R11.1
NetP4_1: P4.1 U6.2 | length 6.5
  Top Layer w0.508: P4.1 57.785,31.31 58.35,31.875 59.1,31.875 59.795,32.57 U6.2@59.795,34.75
NetP5_1: P5.1 U8.2 | length 7.3
  Top Layer w0.254: P5.1 35.735,31.085 36.35,31.7 38.325,31.7 38.72,32.095 U8.2@38.72,34.3
NetP7_1: P7.1 R17.1 R20.2 | length 30
  Top Layer w0.762: P7.1 58.8,76.625 59.75,75.675 R17.1 61.9,72.475 62.325,72.05 62.325,66.175 61.84,65.69 R20.2
NetP8_2: P8.2 Q1.2 | length 2.7
  Top Layer w0.762: Q1.2 40.775,58.1 P8.2
NetQ1_1: Q1.1 R7.1 | length 4.2
  Top Layer w0.508: Q1.1 36.175,57.275 36.625,56.825 37.575,56.825 37.95,56.45 37.95,55.272 R7.1
NetR6_1: R6.1 U3.1 | length 3.8
  Top Layer w0.254: R6.1 45.065,45.819 45.875,45.009 U3.1
NetR10_1: R10.1 U4.1 | length 5.7
  Top Layer w0.254: R10.1 49.895,45.63 50.15,45.375 52.25,45.375 52.475,45.15 U4.1
NetR12_1: R12.1 U6.1 | length 11.2
  Top Layer w0.508: U6.1@57.255,34.75 57.255,32.905 56.975,32.625 56.475,32.625 55.925,32.075 55.925,26.475 R12.1
NetR15_1: R15.1 R19.2 | length 4.5
  Top Layer w0.254: R15.1 45.745,63.91 45.745,59.59 R19.2
NetR19_1: R19.1 R22.2 | length 3.8
  Top Layer w0.254: R19.1 45.96,56.365 46.46,55.865 R22.2
NetR22_1: R22.1 R23.2 | length 3.7
  Top Layer w0.254: R22.1 48.24,57.715 R23.2
NetR26_1: R26.1 U8.1 | length 12.5
  Top Layer w0.254: R26.1 33.95,26.475 33.775,26.65 33.775,34.2 33.875,34.3 U8.1@36.18,34.3
NetR28_2: R28.2 U1.20 | length 16.1
  Top Layer w0.254: R28.2 30.9,12.1 31.125,12.325 v1(31.125,13.875) ; v1(39.425,14.15) 39.475,14.15 40.525,15.2 U1.20
  Bottom Layer w0.254: 31.425,14.15 v1(39.425,14.15)
NRST: C1.2 key1.2 R1.1 U1.7 | length 20.5
  Top Layer w0.254: R1.1 30.7,6.6 31.075,6.975 31.075,8.175 v1@30.8,8.45 ; C1.2 v1(30.55,8.45) ; v2(39.9,12.325) 39.95,12.375 40,12.325 U1.7
  Bottom Layer w0.254: key1.2 30.535,8.435 v1(30.55,8.45) 32.9,8.45 33.35,8.9 33.35,11.775 33.9,12.325 v2(39.9,12.325) v2@39.95,12.375
OSC32_IN: C6.1 U1.3 Y1.2 | length 14.1
  Top Layer w0.254: Y1.2 33.3,2.1 32.925,2.475 32.925,7.675 33.225,7.975 C6.1 34.16,8.885 34.325,9.05 38,9.05 U1.3
OSC32_OUT: C7.1 U1.4 Y1.1 | length 13.3
  Top Layer w0.254: C7.1 34.225,5.15 34.525,4.85 35.575,4.85 ; Y1.1 35.62,4.805 35.575,4.85 ; U1.4 38.5,5.45 37.9,4.85 35.575,4.85
OSC_IN: C8.1 U1.5 Y2.1 | length 9.5
  Top Layer w0.254: U1.5 39,6.5 39.35,6.15 C8.1 40.8,4.625 40.523,4.348 Y2.1
OSC_OUT: C9.1 U1.6 Y2.2 | length 13.1
  Top Layer w0.254: U1.6 39.5,8.2 39.675,8.025 C9.1 40.78,7.395 41.05,7.125 44.85,7.125 45.4,6.575 Y2.2
PA8: P3.2 U1.29 | length 24.1
  Top Layer w0.254: U1.29 40.5,19.7 40.836,20.036 v2@52.089,20.036
  Bottom Layer w0.254: P3.2 50.15,25.475 50.525,25.1 51.55,25.1 51.95,24.7 v2@51.95,19.898 ; v2(51.95,19.85) v2@51.95,19.898 ; v2@52.089,20.036 v2@51.95,19.898
PA9: P4.2 U1.30 | length 33.7
  Top Layer w0.254: U1.30 40,20.2 40.268,20.468 51.598,20.468 51.741,20.611 52.484,20.611 52.627,20.468 61.168,20.468 61.85,21.15 61.85,29.05 61.375,29.525 P4.2
PA10: P2.2 U1.31 | length 17.8
  Top Layer w0.254: U1.31 39.5,20.525 39.875,20.9 46.125,20.9 46.375,21.15 v1(46.375,24.775)
  Bottom Layer w0.254: P2.2 46.375,28.7 v1(46.375,24.775)
PB10: M2.8 U1.21 | length 31.4
  Top Layer w0.254: v1(38.475,14.925) 38.995,14.925 39.767,15.697 43.797,15.697 U1.21
  Bottom Layer w0.254: M2.8 24.89,3.465 25.45,4.025 25.45,14.55 25.825,14.925 v1(38.475,14.925)
PB11: M2.1 U1.22 | length 27.2
  Top Layer w0.254: v1(39.05,15.95) 39.3,16.2 U1.22
  Bottom Layer w0.254: M2.1 21.075,12.525 21.275,12.725 24.725,12.725 25.018,13.018 25.018,15.525 25.443,15.95 v1(39.05,15.95)
SEL: R18.1 U6.4 U7.8 | length 15.3
  Top Layer w0.254: U7.8 55.355,49.945 v1(55.375,49.925) ; U6.4 57.325,44.725 57.825,45.225 59.05,45.225 59.18,45.355 R18.1 59.18,49.845 v1(59.1,49.925)
  Bottom Layer w0.254: v1(55.375,49.925) v1(59.1,49.925)
SWCLK: J1.4 U1.37 | length 11.6
  Top Layer w0.254: v1(35.475,20.975) 35.475,19.575 35.7,19.35 U1.37
  Bottom Layer w0.254: v1(35.475,20.975) 36.925,22.425 J1.4
SWDIO: J1.3 U1.34 | length 10.4
  Top Layer w0.254: U1.34 38,20.3 39.075,21.375 39.739,21.375 39.749,21.384 42.199,21.384 42.213,21.37 44.97,21.37 45.19,21.59 J1.3
USART2_RX: P1.1 U1.13 | length 30.5
  Top Layer w0.254: U1.13 v1(45.675,11.7)
  Bottom Layer w0.254: v1(45.675,11.7) 62.975,11.7 63.525,11.15 63.525,2.375 63.2,2.05 P1.1
USART2_TX: P1.2 U1.12 | length 25.1
  Top Layer w0.254: U1.12 v2(45.575,10.4)
  Bottom Layer w0.254: v2(45.575,10.4) 45.6,10.375 61.775,10.375 61.85,10.3 P1.2
VBAT: D1.2 D2.2 U1.1 | length 19.3
  Top Layer w0.254: v1(35.3,10.4) U1.1 ; v1(47.95,9.6) 47.975,9.625 D2.2 50.125,11.65 D1.2
  Bottom Layer w0.254: v1(35.3,10.4) 35.3,9.85 35.55,9.6 v1(47.95,9.6)
pads on no net: B1.3 B1.4 K1.3 M1.4 M2.2 M2.3 M2.6 U1.2 U1.10 U1.11 U1.14 U1.15 U1.16 U1.17 U1.18 U1.19 U1.25 U1.26 U1.27 U1.28 U1.32 U1.33 U1.38 U1.39 U1.40 U1.42 U1.43 U1.45 U1.46

## Polygon pours and split planes (outlines as drawn)
DGND on Bottom Layer "Top Layer-No Net 1" (solid, remove dead copper, pour order 68): 0.425,37.375 63.95,37.375 64,37.325 64,-0.358 -0.133,-0.358 -0.075,-0.3 -0.075,37.25
AC220V-N on Bottom Layer "Top Layer-No Net 1" (solid, remove dead copper, pour order 38): 16.825,43.15 16.975,43.3 16.975,62.625 10.375,62.625 10.85,62.15 10.85,43.275 10.975,43.15 11,43.175 16.775,43.175
AC220V-N on Bottom Layer "Top Layer-No Net 1" (solid, remove dead copper, pour order 36): 6.375,62.175 6.375,68.025 10.775,68.025 10.8,68.05 10.825,68.025 15.475,68.025 15.525,67.975 15.375,67.825 15.375,62.175
AC220V-N on Bottom Layer "Top Layer-No Net 1" (solid, remove dead copper, pour order 54): 40.5,42.025 23.825,42.025 23.375,42.475 23.375,52.275 23.7,52.6 40.6,52.6 40.425,52.425 40.425,42
AC220V-N on Bottom Layer "Bottom Layer-No Net" (solid, pour order 72): 63.875,52 63.65,52.225 63.65,74.175 46.05,74.175 45.075,73.2 45.075,51.85 45,51.775 45.2,51.575 63.8,51.575
DGND on Top Layer "Top Layer-No Net 1" (solid, remove dead copper, pour order 70): 0.425,37.375 0.5,37.3 63.775,37.3 63.775,-0.175 63.958,-0.358 0,-0.358 0,37.1 -0.075,37.175

## Keep-outs
Keep-Out Layer:
  lines w0.254: 0,-0.358 64,-0.358 64,80.975 0,80.975 0,-0.358

## Silkscreen, mask and mechanical layers (free items; w line width, h text height)
Top Overlay:
  lines w0.254: 26.95,-2.15 27,-2.1
  text "AC~IN" at 4,78.75 h0.76
  text "AC~OUT" at 47.85,78.375 h0.76
  text "+5V" at 43.325,59.35 h0.76 r90
  text "GND" at 43.325,56.85 h0.76 r90
  text "DIO" at 44.9,20.95 h0.76 r270
  text "CLK" at 42.775,20.9 h0.76 r270
  text "DGND" at 47.35,20.8 h0.76 r270
  text "3.3v" at 49.95,20.65 h0.76 r270
  text "U2_TX" at 51.875,4.3 h1.52
  text "U2_RX" at 52.125,1.35 h1.52
Bottom Overlay:
  text "scu/wsnlab" at 61.8,77.725 h1.52
  text "david.wang.wei" at 62.35,72.1 h1.52
  text "2018.8.15" at 62.175,67.5 h1.52
Mechanical 1:
  lines w0.762: 2.475,49 2.475,67.925

## Dimensions
0,83.425 to 63.975,83.9 on Top Overlay
-2.8,-0.425 to -2.4,80.95 on Top Overlay